# Altium PCB B2_ANGERS_EONNUM_Emilien_Alexis.PCBDOC
Units mm, origin at the board's own origin, x right, y up, seen from the top; angles counter-clockwise.
Board outline 100 x 40 mm, 2 copper layers (TopLayer, BottomLayer); 15 components, 12 nets, 84 pads, 0 vias.
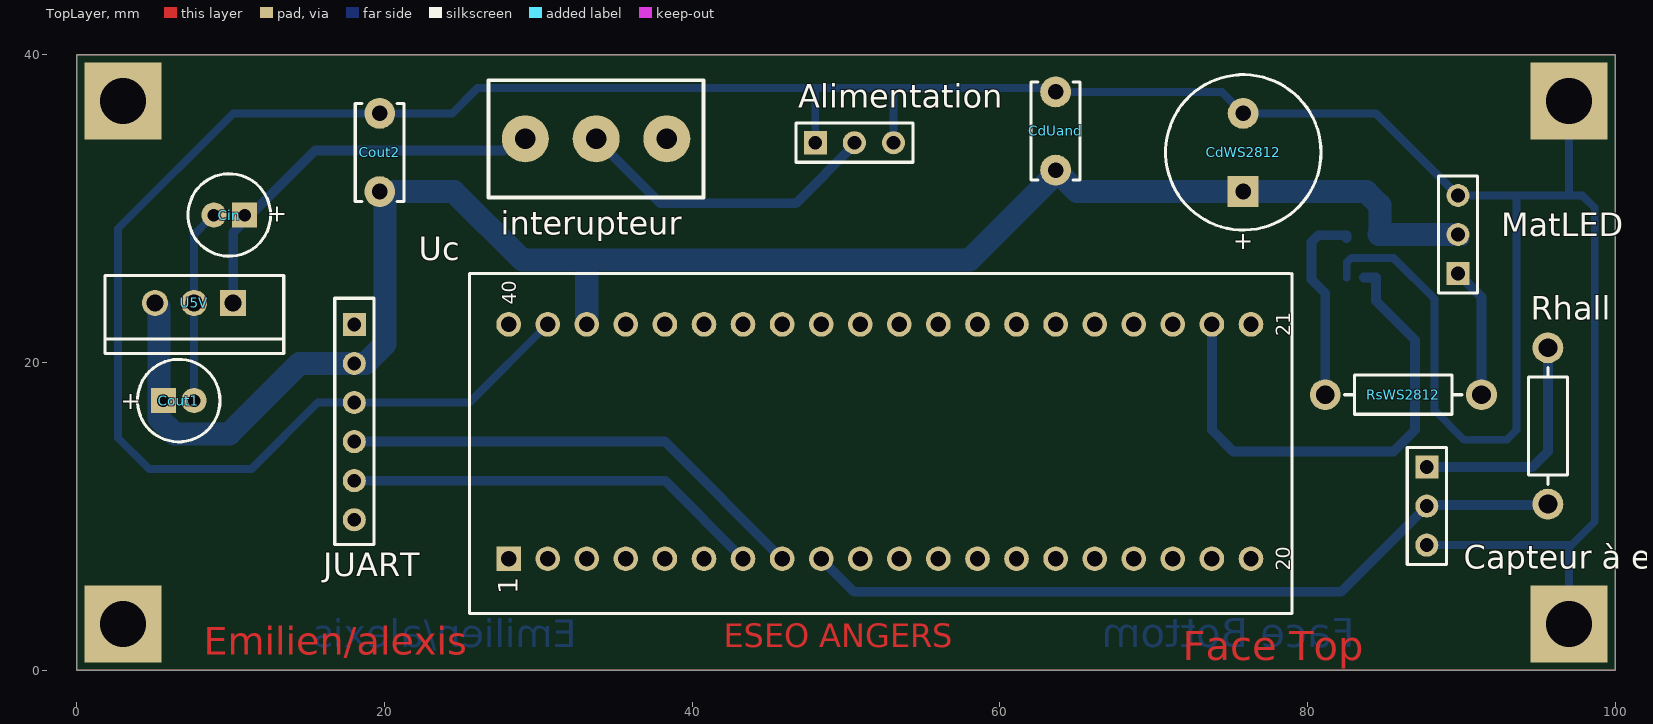
[diagram p0: TopLayer view]
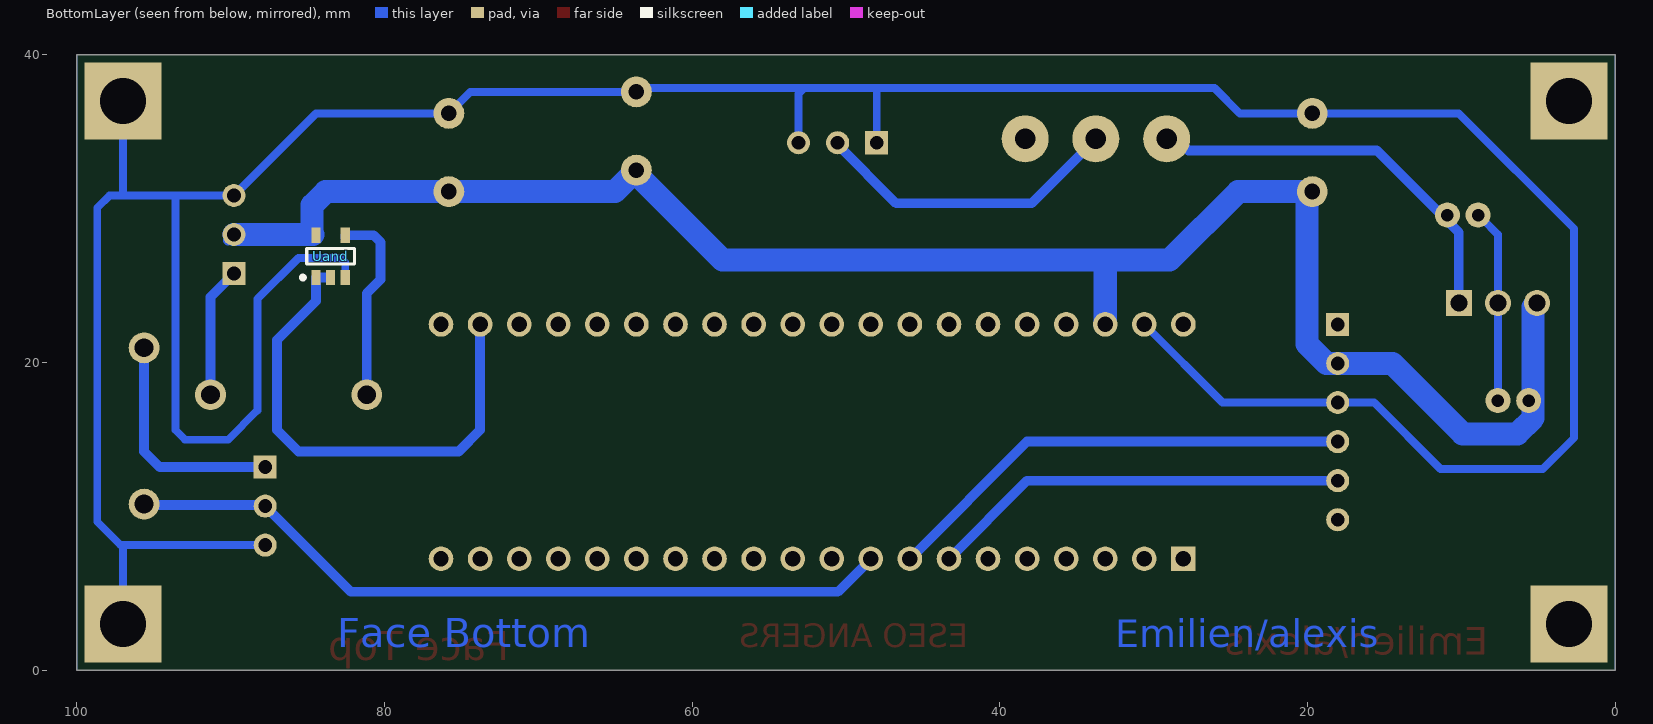
[diagram p1: BottomLayer view, seen from below]

## Layer stack, top to bottom
TopSolder: solder mask 0.0102, Solder Resist, Dk 3.5
TopLayer: signal copper 0.0356
Dielectric1: core 0.32, FR-4, Dk 4.8
BottomLayer: signal copper 0.0356
BottomSolder: solder mask 0.0102, Solder Resist, Dk 3.5

## Board outline
0,0 100,0 100,40 0,40

## Design rules (kind name [scope] priority, off if disabled: settings)
Clearance Clearance_1 [InNamedPolygon('TOP_GND') Or  InNamedPolygon('BottomLayer-GND')] p1: gap=1.016 ignorepadtopadclearanceinfootprint=FALSE
Clearance PowerPlaneClearance [InNamedPolygon('Bot-GND') Or  InNamedPolygon('Top-GND')] p2: gap=1.016 ignorepadtopadclearanceinfootprint=FALSE except(0: Arc-Hole Track-Hole SMDPad-Hole THPad-Hole Via-Hole Fill-Hole Poly-Hole Region-Hole Text-Hole)
Clearance [All] p3: gap=0.305 ignorepadtopadclearanceinfootprint=TRUE
FabricationTestPointUsage TestPointUsage [All] p1: valid=0 allowmultiple=FALSE
FabricationTestpoint Testpoint [All] p1: side=3 testpointundercomponent=TRUE minsize=1.016 maxsize=2.54 preferedsize=1.524 minholesize=0.508 maxholesize=1.016 preferedholesize=0.813 testpointgrid=0.025 allowsidetop=TRUE allowsidebottom=TRUE usegrid=TRUE gridtolerance=0
Height [All] p1: minheight=0 maxheight=50.8 prefheight=12.7
HoleSize [All] p1: absolutevalues=TRUE maxlimit=7.62 minlimit=0.3 maxpercent=80.000 minpercent=20.000
PlaneClearance [All] p1: clearance=1.016
PlaneConnect [All] p1: planeconnectstyle=Relief reliefexpansion=0.5 reliefentries=4 reliefconductorwidth=1.016 reliefairgap=0.5
PolygonConnect [All] p1: connectstyle=Relief reliefconductorwidth=1.016 reliefentries=4 polygonreliefangle="90 Angle" airgapwidth=0.254
RoutingVias [All] p1: holewidth=0.6 width=1.524 viastyle="Through Hole" minholewidth=0.6 minwidth=1.524 maxholewidth=0.6 maxwidth=1.524
SilkToSolderMaskClearance SilkscreenOverComponentPads [IsPad] p1: minsilkscreentomaskgap=0.254 clearancetoexposedcopper=TRUE
SolderMaskExpansion [All] p1: expansion=0.051
Width [All] p1: maxlimit=5.08 minlimit=0.508 preferedwidth=0.635
23 further rules are at their usual default settings.

## Classes and differential pairs
component class projet_pcb_F103: Alimentation "Capteur à effet hall" CdUand CdWS2812 Cin Cout1 Cout2 interupteur JUART MatLED Rhall RsWS2812 U5V Uand

## Components (designator, comment, footprint, x,y, rotation, side; value= is the part's Value field where it differs from the comment)
Alimentation "BARRETTE 3 CONTACTS 1 RANGEE MALE DROITE" BARRETTE_3_M_D 48.006,34.29 r0 top
"Capteur à effet hall" "BARRETTE 3 CONTACTS 1 RANGEE MALE DROITE" BARRETTE_3_M_D 87.757,13.208 r270 top
CdUand "CONDENSATEUR_CER_RAD_5.08" CONDENSATEUR_CERAMIQUE_RADIAL_5.08 63.627,37.592 r270 top value=100nF
CdWS2812 "CONDENSATEUR_POL_ELECTROLY_RAD_5.08/10.16" CONDENSATEUR_POLARISE_ELECTROLYTIQUE_RADIAL_5.08/10.16 75.819,31.115 r90 top value=470µF/25V
Cin "CONDENSATEUR_POL_ELECTROLY_RAD_2.0/5.08" CONDENSATEUR_POLARISE_ELECTROLYTIQUE_RADIAL_2.0/5.08 9.906,29.591 r180 top value=10µF/>25V
Cout1 "CONDENSATEUR_POL_ELECTROLY_RAD_2.0/5.08" CONDENSATEUR_POLARISE_ELECTROLYTIQUE_RADIAL_2.0/5.08 6.62,17.526 r0 top value=1µF/>10V
Cout2 "CONDENSATEUR_CER_RAD_5.08" CONDENSATEUR_CERAMIQUE_RADIAL_5.08 19.685,36.195 r270 top value=100nF
interupteur "INTERRUPTEUR_UNIPOLAIRE_DROIT_A_LEVIER" INTER_UNIPOL_DROIT_LEVIER 33.754,34.544 r90 top (schematic designator S?)
JUART "BARRETTE_6 CONTACTS_1 RANGEE_FEMELLE_DROITE" BARRETTE_6_F_D 18.034,22.479 r270 top
MatLED "BARRETTE 3 CONTACTS 1 RANGEE MALE DROITE" BARRETTE_3_M_D 89.789,25.781 r90 top
Rhall "RESISTANCE_AXIALE_1/4W" RESISTANCE_1/4W 95.631,10.795 r90 top value=10k
RsWS2812 "220" RESISTANCE_1/4W 91.313,17.907 r180 top
U5V "REGULATEUR_TO220_78XX" REGULATEUR_TO220_78XX 7.62,23.876 r180 top
Uand "SN74AHCT1G08DBVR" DBV0005A_N 83.505,26.902 r90 bottom
Uc "STM32F103C8T6/PCB_DIP40" STM32F103C8T6_DIP40 28.067,7.239 r90 top

## Footprints (in the part's own frame and the unit in brackets; to place one, negate y for a bottom-side part, rotate by r counter-clockwise, add the part's x,y. Pads: shape width x height; smd on the part's side, far side on the other; paste and mask are expansions set on the pad)
BARRETTE_3_M_D [mm] "BARRETTE 3 CONTACTS ; 1 RANGEE ; DROITE ; MALE ; ESPACEMENT BROCHES = 2.54 mm"
  rect 1.5x1.5 hole 0.9: 1(0,0)
  round 1.5 hole 0.9: 2(2.54,0) 3(5.08,0)
  silkscreen extent -1.27,-1.27 6.35,1.27, body extent -1.21,-1.42 6.41,1.5, height 8.61
BARRETTE_6_F_D [mm] "BARRETTE 6 CONTACTS ; 1 RANGEE ; DROITE ; FEMELLE ; ESPACEMENT BROCHES = 2.54 mm"
  rect 1.5x1.5 hole 0.9: 1(0,0)
  round 1.5 hole 0.9: 2(2.54,0) 3(5.08,0) 4(7.62,0) 5(10.16,0) 6(12.7,0)
  silkscreen extent -1.7,-1.27 14.3,1.27, body extent -1.57,-1.2 14.17,1.21, height 8.5
CONDENSATEUR_CERAMIQUE_RADIAL_5.08 [mil] "CONDENSATEUR TRAVERSANT CERAMIQUE RADIAL ; DIMENSIONS : 3.17mm x 5.08mm"
  round 79 hole 40: 1(0,0) 2(200,0)
  silkscreen extent -25,-63 225,63, body extent -11,-43 209,42, height 148
CONDENSATEUR_POLARISE_ELECTROLYTIQUE_RADIAL_2.0/5.08 [mil] "CONDENSATEUR POLARISE ELECTROLYTIQUE RADIAL ; DIAMETRE : 5.08mm ; ESPACEMENT BROCHES : 2mm"
  rect 64x64 / inner round 64 / far side round 64 hole 32: 1(-39.37,0)
  round 64 hole 32: 2(39.37,0)
  silkscreen extent -106,-106 105,106, body extent -98,-98 98,98, height 433
CONDENSATEUR_POLARISE_ELECTROLYTIQUE_RADIAL_5.08/10.16 [mil] "CONDENSATEUR POLARISE ELECTROLYTIQUE RADIAL ; DIAMETRE : 10.16mm ; ESPACEMENT BROCHES : 5.08mm"
  rect 79x79 / inner round 79 / far side round 79 hole 40: 1(0,0)
  round 79 hole 40: 2(200,0)
  silkscreen extent -98,-199 299,198, body extent -98,-197 295,197, height 630
DBV0005A_N [mm] "SOT23, 5-Leads, Body 3.05x1.75mm, Pitch 0.95mm, IPC Medium Density"
  rect 1x0.6 smd: 1(-1.375,0.95) 2(-1.375,0) 3(-1.375,-0.95) 4(1.375,-0.95) 5(1.375,0.95)
  silkscreen extent -1.5,-1.55 0.5,1.93, body extent -1.42,-1.46 1.42,1.46, height 1.08
INTER_UNIPOL_DROIT_LEVIER [mil] "INTERRUPTEUR UNIPOLAIRE DROIT A LEVIER ON/ON ; ESPACEMENTS BROCHES : 5.08mm"
  round 120 hole 52: 1(0,181.1) 2(0,0) 3(0,-181.1)
  silkscreen extent -150,-275 150,275, body extent -233,-250 233,250, height 1097
REGULATEUR_TO220_78XX [mm] "BOITIER TO220 ; DIMENSIONS : 11.2mm x 4.7mm ; ESPACEMENT BROCHES : 2.54 mm"
  rect 1.7x1.7 hole 1.1: 1(-2.54,0)
  round 1.7 hole 1.1: 2(0,0) 3(2.54,0)
  silkscreen extent -5.83,-1.77 5.8,3.29, body extent -5.61,-1.59 5.61,3.1, height 19.33
RESISTANCE_1/4W [mil] "RESISTANCE 0.25W; DIAMETRE : 2.54mm ; LONGUEUR : 6.35mm ; PAS : 10.16mm"
  round 79 hole 48: 1(0,0) 2(400,0)
  silkscreen extent 50,-50 350,50, body extent -15,-47 409,44, height 116
STM32F103C8T6_DIP40 [mm] "STM32F103 monté sur DIP40"
  rect 1.6x1.6 hole 1: 1(0,0)
  round 1.6 hole 1: 2(0,-2.54) 3(0,-5.08) 4(0,-7.62) 5(0,-10.16) 6(0,-12.7) 7(0,-15.24) 8(0,-17.78) 9(0,-20.32) 10(0,-22.86) 11(0,-25.4) 12(0,-27.94) 13(0,-30.48) 14(0,-33.02) 15(0,-35.56) 16(0,-38.1) 17(0,-40.64) 18(0,-43.18) 19(0,-45.72) 20(0,-48.26) 21(15.24,-48.26) 22(15.24,-45.72) 23(15.24,-43.18) 24(15.24,-40.64) 25(15.24,-38.1) 26(15.24,-35.56) 27(15.24,-33.02) 28(15.24,-30.48) 29(15.24,-27.94) 30(15.24,-25.4) 31(15.24,-22.86) 32(15.24,-20.32) 33(15.24,-17.78) 34(15.24,-15.24) 35(15.24,-12.7) 36(15.24,-10.16) 37(15.24,-7.62) 38(15.24,-5.08) 39(15.24,-2.54) 40(15.24,0)
  silkscreen extent -3.56,-50.92 18.54,2.54, body extent -3.63,-51.04 18.37,6.1, height 20.63

## Part data
Alimentation "Capteur à effet hall" MatLED: library part "BARRETTE_3 CONTACTS_1 RANGEE_MALE_DROITE"
  Alimentation: Alimentation=Alimentation
  "Capteur à effet hall" MatLED: Type=M_D_3
CdUand Cout2: "CONDENSATEUR TRAVERSANT CERAMIQUE RADIAL 5.08mm", Type=RADIAL_5.08
CdWS2812: "CONDENSATEUR POLARISE ELECTROLYTIQUE RADIAL 5.08/10.16", Type=POL_RAD_5.08/10.16
Cin Cout1: "CONDENSATEUR POLARISE ELECTROLYTIQUE RADIAL 2.0/5.08", Type=POL_RAD_2.0/5.08
JUART: "BARRETTE 6 CONTACTS 1 RANGEE FEMELLE DROITE", Type=F_D_6
Rhall: "RESISTANCE TRAVERSANTE AXIALE 1/4W", Type=1/4W
RsWS2812: library part Resistor, "Resistor", LatestRevisionDate=17-Jul-2002, LatestRevisionNote="Re-released for DXP Platform.", PackageReference=AXIAL-0.5, Published=8-Jun-2000, Publisher="Altium Limited"
U5V: "REGULATEUR DE TENSION POSITIVE 78XX BOITIER TO220", Package=TO220, Type=7805
Uand: "Single 2-Input Positive-AND Gate, DBV0005A, LARGE T&R", F @ Nom Voltage(Max)(Mhz)=75, Generic Part Number=SN74AHCT1G08, ICC @ Nom Voltage(Max)(mA)=0.01, Manufacturer="Texas Instruments", Operating Temperature Range(C)="-40 to 125", Rating=Catalog, Supplier Part Number 1=595-SN74AHCT1G08DBVR, tpd @ Nom Voltage(Max)(ns)=7.1, Voltage(Nom)(V)=5, 3-State Output=No, Bits(#)=1, ComponentLink1Description="Manufacturer URL", ComponentLink1URL=http://www.ti.com/, ComponentLink2Description=Datasheet, ComponentLink2URL=http://www.ti.com/lit/ds/symlink/sn74ahct1g08.pdf, DatasheetVersion=SCLS315P, Gate Type=AND, Input Type=CMOS, Logic=True, Output Drive (IOL/IOH)(Max)(mA)=8/-8, Output Type=CMOS, PackageReference=DBV0005A, PartNumber=SN74AHCT1G08DBVR, Schmitt Trigger=No, Sub-Family="AND Gate", Supplier 1=Mouser, Supplier 2=Digi-Key, Supplier 3=Digi-Key, Supplier 4=Digi-Key, Supplier Part Number 2=296-1113-2-ND, Supplier Part Number 3=296-1113-1-ND, Supplier Part Number 4=296-1113-6-ND, Technology Family=AHCT, VCC(Max)(V)=5.5, VCC(Min)(V)=2
Uc: "MICROCONTROLEUR 32 BITS - 72MHz - 34 I/O - 64 KO : FLASH - 20KO RAM - 10 CANAUX A/D 12 BITS - DIP40 - UART, SPI, I2C, USB, CAN", Package=DIP40, Type=STM32F103C8T6
interupteur: Type=UNIPOL_D_L

## Free pads (board coordinates)
  rect 5x5 hole 3: 1(3,37) 2(3,3) 3(97,3) 4(97,37)

## Nets (pads, with @x,y where several pads share a name; then routed paths per layer and width w, separated by ;. In a path a pad name is that pad's centre, name@x,y a point inside that pad or via, vN(x,y) a via of type N, cw(c..) or ccw(c..) an arc to the next point about the centre after c; other vN are vias at no path point)
+3V3_BP: Uc.40
+5V: CdUand.2 CdWS2812.1 Cout1.1 Cout2.2 JUART.2 MatLED.2 U5V.3 Uand.5 Uc.38 | length 117.8
  BottomLayer w0.635: JUART.2 JUART.2@18.161,19.939 ; CdUand.2@63.627,32.258 CdUand.2 ; Uand.5@84.455,28.126 Uand.5@84.65,28.321 ; MatLED.2 MatLED.2@90.17,27.94
  BottomLayer w1.5: U5V.3 5.334,23.622 5.334,16.383 6.35,15.367 9.906,15.367 14.478,19.939 JUART.2 ; JUART.2@18.161,19.939 18.773,19.939 20.042,21.208 20.042,30.758 Cout2.2 24.511,31.115 28.956,26.67 33.528,26.67 ; Uc.38 33.147,26.289 33.528,26.67 ; CdUand.2@63.627,32.258 58.039,26.67 33.528,26.67 ; CdUand.2 65.024,31.115 CdWS2812.1 83.83,31.115 84.709,30.236 84.709,28.38 84.65,28.321 MatLED.2
Capteur_effet_hall: "Capteur à effet hall.2" Rhall.1 Uc.9 | length 50.5
  BottomLayer w0.635: Uc.9 50.534,5.092 82.181,5.092 87.757,10.668 87.82,10.731 95.567,10.731 Rhall.1
GND: "Capteur à effet hall.3" Alimentation.1 Alimentation.3 CdUand.1 CdWS2812.2 Cin.2 Cout1.2 Cout2.1 JUART.3 MatLED.3 pad.3 pad.4 U5V.2 Uand.3 Uc.19 Uc.20 Uc.39 | length 250
  BottomLayer w0.508: Cout1.2 U5V.2 7.62,28.321 Cin.2@8.636,29.337 ; Uc.39 25.527,17.399 JUART.3 15.665,17.399 11.347,13.081 4.699,13.081 2.667,15.113 2.667,28.702 10.16,36.195 Cout2.1 24.396,36.195 26.047,37.846 48.006,37.846 ; Alimentation.1 48.006,37.846 ; Alimentation.3 53.086,37.465 52.705,37.846 ; Uand.3 82.555,26.499 82.853,26.797 85.598,26.797 88.265,24.13 88.265,16.891 90.17,14.986 92.964,14.986 93.599,15.621 93.599,30.734 93.726,30.861 ; 87.757,8.128 97.155,8.128 ; pad.3 97,7.973 97.155,8.128 ; pad.4 pad.4@97,34.984 ; pad.4@97.746,35.731 pad.4@97,34.984 ; 48.006,37.846 52.705,37.846 ; 52.705,37.846 63.373,37.846 CdUand.1 74.422,37.592 CdWS2812.2 84.455,36.195 MatLED.3 93.726,30.861 ; 93.726,30.861 97.155,30.861 ; pad.4@97,34.984 97,31.016 97.155,30.861 ; 97.155,8.128 98.679,9.652 98.679,30.055 97.873,30.861 97.155,30.861
Net_2: Alimentation.2 interupteur.2 | length 20.2
  BottomLayer w0.635: interupteur.2 37.945,30.353 46.736,30.353 50.546,34.163 Alimentation.2
"NetCapteur à effet hall_1": "Capteur à effet hall.1" Rhall.2 | length 15.2
  BottomLayer w0.635: 87.757,13.208 94.615,13.208 95.631,14.224 Rhall.2 Rhall.2@95.504,20.955
NetMatLED_1: MatLED.1 RsWS2812.1 | length 8.9
  BottomLayer w0.635: MatLED.1 91.313,24.257 RsWS2812.1 RsWS2812.1@91.567,18.161
NetRsWS2812_2: RsWS2812.2 Uand.4 | length 13.1
  BottomLayer w0.635: RsWS2812.2 81.153,24.511 80.264,25.4 80.264,27.822 80.719,28.277 82.538,28.277 82.538,28.094 82.555,28.112 Uand.4
PA2_U2TX: JUART.5 Uc.7 | length 27.4
  BottomLayer w0.635: JUART.5 38.227,12.319 Uc.7
PA3_U2RX: JUART.4 Uc.8 | length 31
  BottomLayer w0.635: JUART.4 38.227,14.859 Uc.8
PB13_LEDS_WS2812: Uand.1 Uand.2 Uc.22 | length 33
  BottomLayer w0.635: Uc.22 73.787,15.612 75.175,14.224 85.598,14.224 86.995,15.621 86.995,21.463 84.455,24.003 Uand.1 Uand.2@83.681,25.527
VCC: Cin.1 interupteur.1 U5V.1 | length 26.1
  BottomLayer w0.635: U5V.1 10.16,28.448 15.494,33.782 27.739,33.782 28.501,34.544 interupteur.1
pads on no net: interupteur.3 JUART.1 JUART.6 Uc.1 Uc.2 Uc.3 Uc.4 Uc.5 Uc.6 Uc.10 Uc.11 Uc.12 Uc.13 Uc.14 Uc.15 Uc.16 Uc.17 Uc.18 Uc.21 Uc.23 Uc.24 Uc.25 Uc.26 Uc.27 Uc.28 Uc.29 Uc.30 Uc.31 Uc.32 Uc.33 Uc.34 Uc.35 Uc.36 Uc.37

## Polygon pours and split planes (outlines as drawn)
no net on BottomLayer "BottomLayer-GND" (solid, shelved, pour order 13): 0,40 100,40 100,0 0,0
GND on TopLayer "TOP_GND" (solid, shelved, pour order 11): 0,40 100,40 100,0 0,0

## Other copper
TopLayer:
  text "ESEO ANGERS" at 42.037,1.5 h1.52
  text "Emilien/alexis" at 8.255,1.016 h1.8
  text "Face Top" at 71.882,0.635 h1.91
BottomLayer:
  text "Emilien/alexis" at 32.512,1.5 h1.8
  text "Face Bottom" at 83.058,1.5 h1.91

## Silkscreen, mask and mechanical layers (free items; w line width, h text height)
TopOverlay:
  text "Consignes / Conseils :" at 147.066,53.467 h10
  text "1- désactivez la fonctionnalité \"online DRC\"" at 159.385,44.196 h10
  text "Tools->Preferences -> décocher 'online DRC'" at 171.45,34.417 h10
  text "Tools->Reset error markers" at 171.831,23.622 h10
  text "2- Masquez les plans de masse" at 159.258,12.827 h10
  text "Tools->Polygon Pours -> Shelve 2 polygons" at 171.958,3.048 h10
  text "(penser à les réafficher et le re-générer lorsque le routage est terminé !)" at 171.704,-6.985 h10
  text "3- Si elles sont visibles / gênantes : masquez les couches mécaniques 3D" at 159.258,-18.288 h10
  text "Bouton-droit sur les onglets (en bas) Mechanical1, 13 -> Hide" at 173.228,-29.591 h10
  text "4- mettre vos noms à la place de \"nom du binôme\"" at 159.131,-43.434 h10
  text "5- Par défaut, la taille de piste minimale est définie à 20 mils.  /     Si cela s'avère absolutement nécessaire, vous pouvez modifier ce réglage dans /     -> Design -> Rules -> Routing -> Width -> Width" at 158.242,-81.28 h10
  text "6- Par défaut, la clearance (espace minimale entre deux objets dont le net diffère) est reglée à 20 mils. /     Si cela s'avère nécessaire (petit composant CMS / volonté assumée d'une règle moins stricte), /      vous pouvez descendre à 10mils : /     -> Design -> Rules -> Electrical -> Clearance-> Clearance" at 159.258,-121.412 h10
  text "7- supprimez ces consignes si elles vous gênent" at 159.639,-132.08 h10
Mechanical15:
  the board outline again, w0.508

## Text inside footprints (layer, text, board x,y; h text height)
CdWS2812: TopOverlay "+" at 76.309,27.205 h1.14 r90
Cin: TopOverlay "+" at 13.686,30.141 h1.14 r180
Cout1: TopOverlay "+" at 2.84,16.976 h1.14
Uc: TopOverlay "21" at 78.867,21.717 h0.9 r90; TopOverlay "40" at 28.575,23.749 h0.9 r90; TopOverlay "20" at 78.867,6.477 h0.9 r90; TopOverlay "1" at 28.667,4.939 h1.27 r90